# EAGLE board buffer_v2 (EAGLE 6.4)
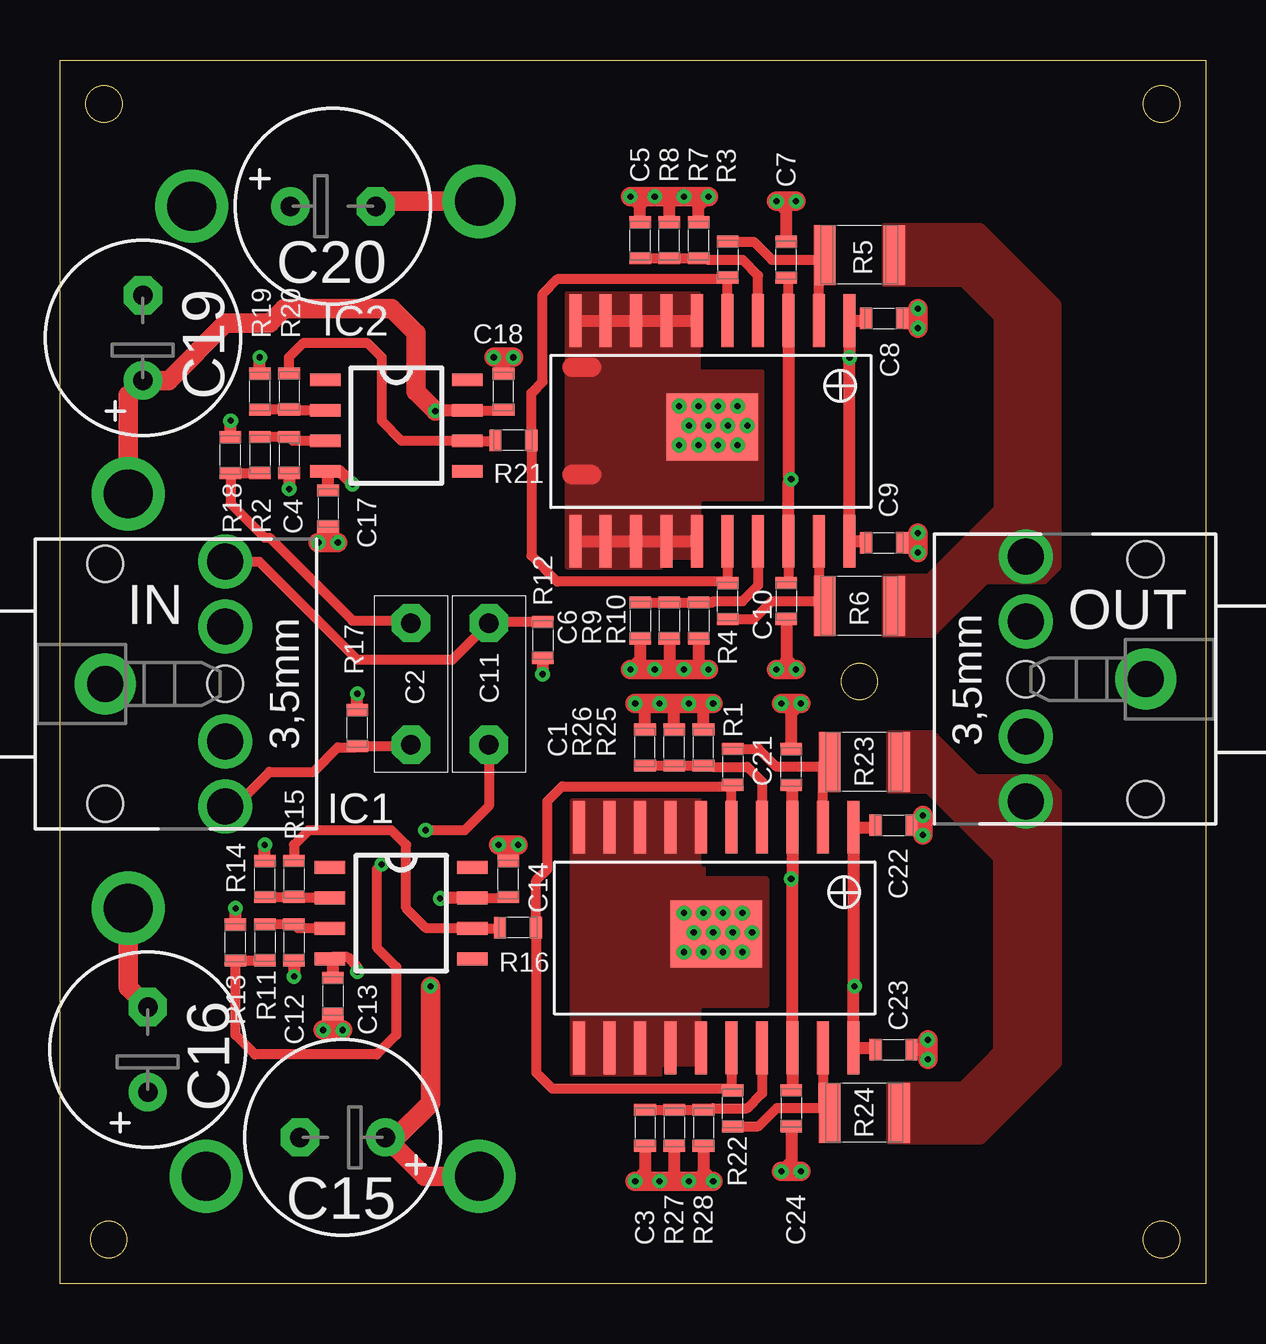
[diagram p0: board, top side]
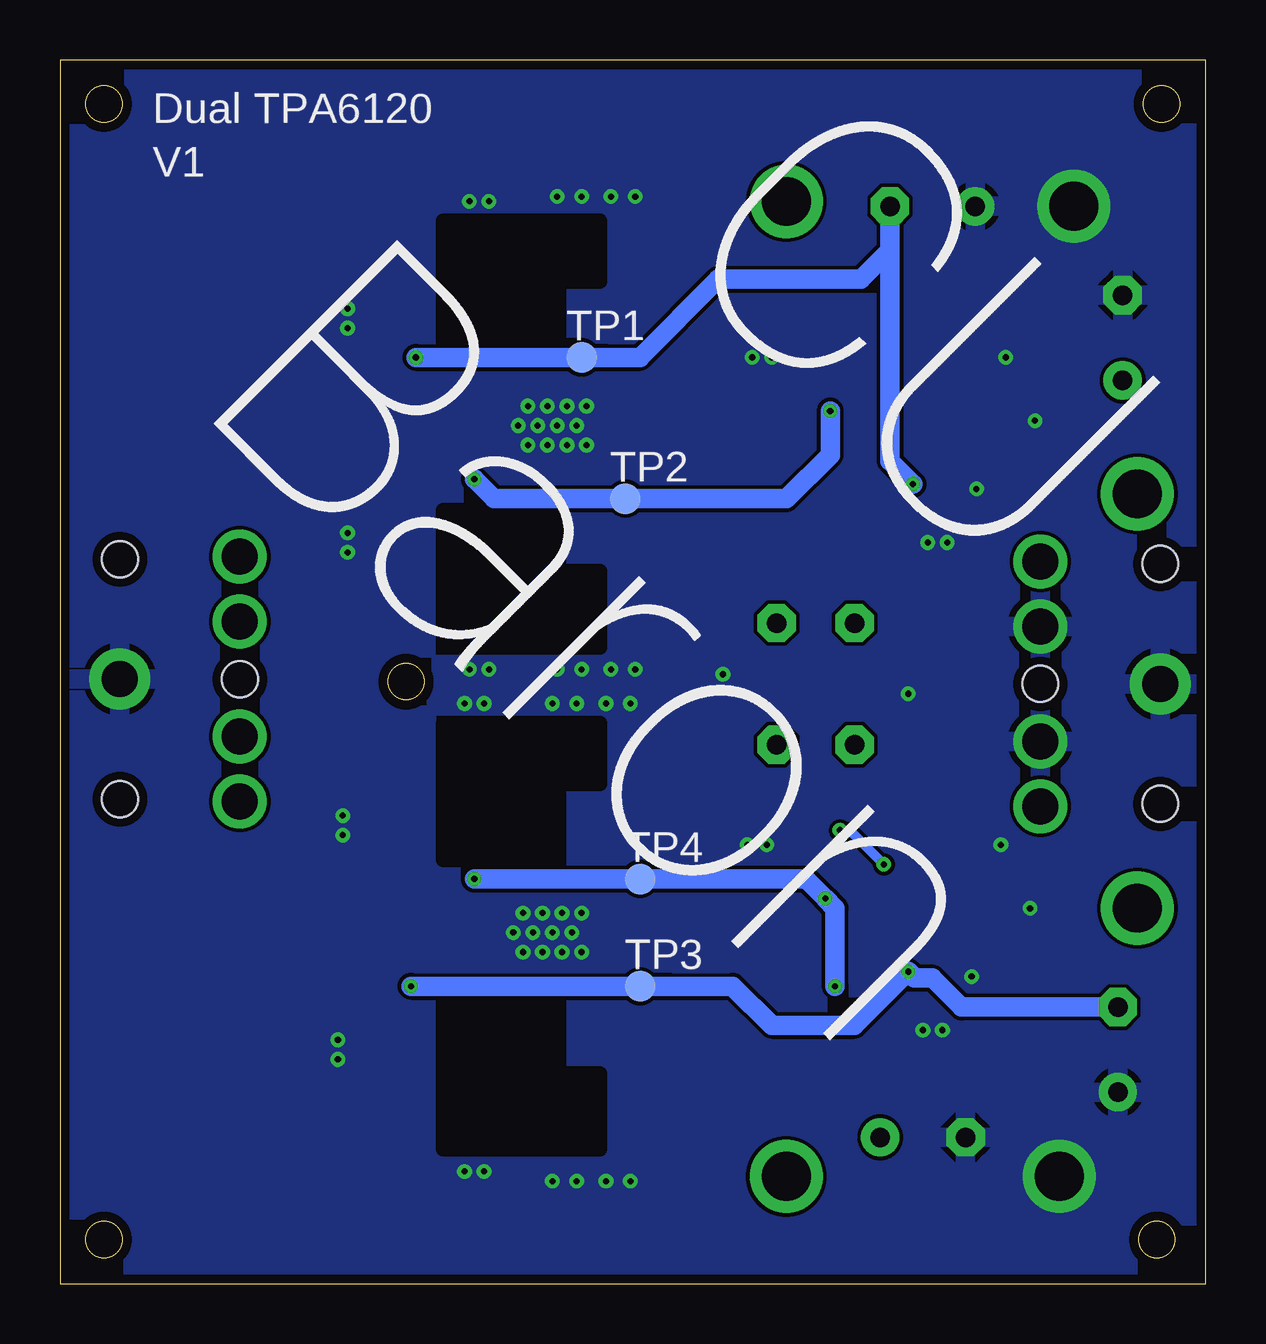
[diagram p1: board, bottom side, seen from below]

Size 47.75 x 51 mm. Coordinates in mm from the lower left corner, seen from the top.
Outline: 0,0 0,51 47.75,51 47.75,0 0,0
Outline: circle at 1.83,49.17 radius 0.76
Outline: circle at 45.92,49.17 radius 0.76
Outline: circle at 2.03,1.83 radius 0.76
Outline: circle at 45.92,1.83 radius 0.76
Outline: circle at 33.32,25.1 radius 0.76
Copper layers (1*16): Top 0.0356mm / dielectric 1.5011mm / Bottom 0.0356mm
Design rules "LaenPCBOrder": minimum track width 6mil, minimum drill 13mil, track to track 6mil, track to pad 6mil, pad to pad 6mil, via to via 6mil, smd to smd 6mil, copper to edge 15mil, drill to drill 6mil, minimum pad ring 7mil, minimum via ring 7mil, stop-mask expansion 3mil, vias tented up to drill 0mil, thermal gap 10mil
tRestrict: area 25.2,17.5 to 31.9,23.6; area 25.2,5.5 to 31.9,11.4; area 25.2,38.4 to 31.9,44.5; area 25.2,26.4 to 31.9,32.5
bRestrict: area 25.2,17.7 to 31.8,23.4; area 25.2,5.6 to 31.8,11.3; area 25.2,26.5 to 31.8,32.2; area 25.2,38.6 to 31.8,44.3

## Footprints (pad centres in the part's own frame; a part is rotated, then mirrored left to right if it is on the bottom)
0603L3 = smd 0.5 x 0.9: P$1 -0.75,0; P$2 0.75,0
R5B3 = drill 0.813 pad 1.6 octagon: 1 -2.54,0; 2 2.54,0
E3,5-8 = drill 0.813 pad 1.6: + -1.778,0 | drill 0.813 pad 1.6 octagon: - 1.778,0
8-LEAD-SOIC_N = smd 1.27 x 0.53: 1 -2.965,1.905; 2 -2.965,0.635; 3 -2.965,-0.635; 4 -2.965,-1.905; 5 2.965,-1.905; 6 2.965,-0.635; 7 2.965,0.635; 8 2.965,1.905
STX3100 = drill 1.5 pad 2.54: 1 2.7,-0.1 | drill 1.5: 2 7.7,5; 3 7.7,2.3; 4 7.7,-2.5; 5 7.7,-5.2 | hole 1.5: 2.7,4.9; 2.7,-5.1; 7.7,-0.1
1210L3 = smd 0.9 x 2.5: P$1 -1.45,0; P$2 1.45,0
TP13R = smd 1.3 x 1.3: TP 0,0
TPA6120_TPA6120 = smd 0.5 x 2.2: 1 0.25,1.095; 2 1.52,1.095; 3 2.79,1.095; 4 4.06,1.095; 5 5.33,1.095; 6 6.6,1.095; 7 7.87,1.095; 8 9.14,1.095; 9 10.41,1.095; 10 11.68,1.095; 11 11.68,10.295; 12 10.41,10.295; 13 9.14,10.295; 14 7.87,10.295; 15 6.6,10.295; 16 5.33,10.295; 17 4.06,10.295; 18 2.79,10.295; 19 1.52,10.295; 20 0.25,10.295 | smd 3.81 x 2.79: 21 5.965,5.54

## Placement (x,y rotation side)
C1  100nF/100V  [0603L3]  24.38,22.35 90 top
C2  100nF/50V  [R5B3]  14.63,24.99 90 top
C3  100nF/100V  [0603L3]  24.38,6.5 270 top
C4  100pF/100V  [0603L3]  9.55,34.54 270 top
C5  100nF/100V  [0603L3]  24.18,43.48 90 top
C6  100nF/100V  [0603L3]  24.18,27.64 270 top
C7  100nF/100V  [0603L3]  30.28,42.67 90 top
C8  100nF/100V  [0603L3]  34.34,40.23 0 top
C9  100nF/100V  [0603L3]  34.34,30.89 0 top
C10  100nF/100V  [0603L3]  30.28,28.45 270 top
C11  100nF/50V  [R5B3]  17.88,24.99 270 top
C12  100pF/100V  [0603L3]  9.75,14.22 270 top
C13  100nF/50V  [0603L3]  11.38,11.99 270 top
C14  100nF/50V  [0603L3]  18.69,16.87 90 top
C15  470uF  [E3,5-8]  11.79,6.1 180 top
C16  470uF  [E3,5-8]  3.66,9.75 90 top
C17  100nF/50V  [0603L3]  11.18,32.31 270 top
C18  100nF/50V  [0603L3]  18.49,37.19 90 top
C19  470uF  [E3,5-8]  3.45,39.42 90 top
C20  470uF  [E3,5-8]  11.38,44.91 0 top
C21  100nF/100V  [0603L3]  30.48,21.54 90 top
C22  100nF/100V  [0603L3]  34.75,19.1 0 top
C23  100nF/100V  [0603L3]  34.75,9.75 0 top
C24  100nF/100V  [0603L3]  30.48,7.32 270 top
IC1  AD8610ARZR-8  [8-LEAD-SOIC_N]  14.22,15.44 0 top
IC2  AD8610ARZR-8  [8-LEAD-SOIC_N]  14.02,35.76 0 top
IN  STEREOJACK  [STX3100]  -0.81,25.1 0 top
OUT  STEREOJACK  [STX3100]  47.96,25.1 180 top
R1  1k0  [0603L3]  28.04,21.54 270 top
R2  1k0  [0603L3]  8.33,34.54 270 top
R3  1k0  [0603L3]  27.84,42.67 270 top
R4  1k0  [0603L3]  27.84,28.45 90 top
R5  10  [1210L3]  33.32,42.88 180 top
R6  10  [1210L3]  33.32,28.24 180 top
R7  1k0  [0603L3]  26.62,43.48 90 top
R8  1k0  [0603L3]  25.4,43.48 90 top
R9  1k0  [0603L3]  25.4,27.64 270 top
R10  1k0  [0603L3]  26.62,27.64 270 top
R11  1k0  [0603L3]  8.53,14.22 270 top
R12  470k  [0603L3]  20.12,26.82 270 top
R13  470k  [0603L3]  7.32,14.22 90 top
R14  1k0  [0603L3]  8.53,16.87 90 top
R15  1k0  [0603L3]  9.75,16.87 270 top
R16  1k0  [0603L3]  19.1,14.83 180 top
R17  470k  [0603L3]  12.4,23.16 90 top
R18  470k  [0603L3]  7.11,34.54 90 top
R19  1k0  [0603L3]  8.33,37.19 90 top
R20  1k0  [0603L3]  9.55,37.19 270 top
R21  1k0  [0603L3]  18.9,35.15 180 top
R22  1k0  [0603L3]  28.04,7.32 90 top
R23  10  [1210L3]  33.53,21.74 180 top
R24  10  [1210L3]  33.53,7.11 180 top
R25  1k0  [0603L3]  26.82,22.35 90 top
R26  1k0  [0603L3]  25.6,22.35 90 top
R27  1k0  [0603L3]  25.6,6.5 270 top
R28  1k0  [0603L3]  26.82,6.5 270 top
TP1  PTR1TP13R  [TP13R]  26.01,38.61 0 bottom
TP2  PTR1TP13R  [TP13R]  24.18,32.72 0 bottom
TP3  PTR1TP13R  [TP13R]  23.57,12.4 0 bottom
TP4  PTR1TP13R  [TP13R]  23.57,16.87 0 bottom
U$1  TPA6120_TPA6120  [TPA6120_TPA6120]  33.16,41.24 180 top
U$2  TPA6120_TPA6120  [TPA6120_TPA6120]  33.32,20.12 180 top

## Library data of the parts
C1 C3-C10 C12-C14 C17 C18 C21-C24 R1-R28 = common
C2 C11 = Capacitor-Wima-MKS2-100v
C15 C16 C19 C20 = rcl
IC1 IC2 = ad8610arz
IN OUT = adafruit
TP1-TP4 = testpad
U$1 U$2 = amp

## Nets
+12V_L: C7.P$1 C10.P$1 C18.P$1 C19.+ IC2.7 TP2.TP U$1.3 U$1.18
+12V_R: C14.P$1 C15.+ C21.P$1 C24.P$1 IC1.7 TP4.TP U$2.3 U$2.18
-12V_L: C8.P$1 C9.P$1 C17.P$1 C20.- IC2.4 TP1.TP U$1.1 U$1.20
-12V_R: C13.P$1 C16.- C22.P$1 C23.P$1 IC1.4 TP3.TP U$2.1 U$2.20
BUFF_L_OUT: R3.P$2 R4.P$2 R21.P$1 U$1.5 U$1.16
BUFF_R_OUT: R1.P$2 R16.P$1 R22.P$2 U$2.5 U$2.16
BUFFER_L_OUT: IC2.6 R20.P$1 R21.P$2
BUFFER_R_OUT: IC1.6 R15.P$1 R16.P$2
GND: C1.P$2 C3.P$2 C4.P$2 C5.P$2 C6.P$2 C7.P$2 C8.P$2 C9.P$2 C10.P$2 C12.P$2 C13.P$2 C14.P$2 C15.- C16.+ C17.P$2 C18.P$2 C19.- C20.+ C21.P$2 C22.P$2 C23.P$2 C24.P$2 IN.1 IN.3 IN.4 OUT.1 R7.P$2 R8.P$2 R9.P$2 R10.P$2 R12.P$2 R13.P$2 R14.P$2 R17.P$2 R18.P$2 R19.P$2 R25.P$2 R26.P$2 R27.P$2 R28.P$2 U$1.6 U$1.7 U$1.8 U$1.9 U$1.10 U$1.11 U$1.12 U$1.13 U$1.14 U$1.15 U$1.21 U$2.6 U$2.7 U$2.8 U$2.9 U$2.10 U$2.11 U$2.12 U$2.13 U$2.14 U$2.15 U$2.21
HP_IN_L: C2.1 IN.5 R17.P$1
HP_IN_R: C11.1 IN.2 R12.P$1
HP_OUT_L: OUT.5 R5.P$1 R6.P$1
HP_OUT_R: OUT.2 R23.P$1 R24.P$1
N$1: C11.2 R11.P$2 R13.P$1
N$2: C12.P$1 IC1.3 R11.P$1
N$5: IC1.2 R14.P$1 R15.P$2
N$6: C2.2 R2.P$2 R18.P$1
N$7: C4.P$1 IC2.3 R2.P$1
N$12: IC2.2 R19.P$1 R20.P$2
N$13: C1.P$1 R25.P$1 R26.P$1 U$2.4
N$14: C3.P$1 R27.P$1 R28.P$1 U$2.17
N$19: C5.P$1 R7.P$1 R8.P$1 U$1.4
N$20: C6.P$1 R9.P$1 R10.P$1 U$1.17
OUT_L: R3.P$1 R5.P$2 U$1.2
OUT_L1: R1.P$1 R23.P$2 U$2.2
OUT_R: R4.P$1 R6.P$2 U$1.19
OUT_R1: R22.P$1 R24.P$2 U$2.19

## Tracks (layer width: path | path; a pad name or v marks a point on that pad's centre or on a via)
+12V_L  (via drill 0.25, 2.03)
  Top 0.406: IC2.7 18.45,36.4 C18.P$1 | U$1.3 30.37,41.83 C7.P$1 | U$1.18 30.37,29.29 C10.P$1
  Top 0.508: IC2.7 15.67,36.4 v15.65,36.37 | U$1.3 30.37,33.64 v30.48,33.53 30.37,33.42 U$1.18
  Top 0.813: v2.84,32.92 2.84,37.03 C19.+ 4.52,37.64 6.91,40.03 8.74,40.03 9.35,40.64 13.82,40.64 14.83,39.62 14.83,37.19 v15.65,36.37
  Bottom 0.813: v30.48,33.53 29.67,32.72 TP2.TP 23.37,32.72 17.48,32.72 15.65,34.54 v15.65,36.37
+12V_R  (via drill 0.25, 2.03)
  Top 0.406: IC1.7 18.66,16.08 C14.P$1
  Top 0.508: C24.P$1 30.53,8.12 U$2.18 30.53,16.81 v30.48,16.87 30.53,16.92 U$2.3 30.53,20.73 C21.P$1 | IC1.7 15.87,16.08 v15.85,16.05
  Top 0.813: v17.48,4.47 15.19,4.47 C15.+ 14.02,6.1 15.44,7.52 v15.44,12.4
  Bottom 0.813: v15.44,12.4 15.44,15.65 v15.85,16.05 16.66,16.87 22.76,16.87 TP4.TP v30.48,16.87
-12V_L  (via drill 0.25, 2.03)
  Top 0.508: C9.P$1 33.53,30.94 U$1.20 v32.91,38.6 v32.92,38.61 v32.91,38.62 U$1.1 33.5,40.14 C8.P$1 | C17.P$1 11.18,33.74 IC2.4 11.66,33.86 v12.19,33.32
  Top 0.813: v17.48,45.11 13.36,45.11 C20.-
  Bottom 0.508: TP1.TP 25,38.61 24.99,38.6
  Bottom 0.813: C20.- 13.16,43.08 | 13.16,43.08 13.16,34.29 v12.19,33.32 | v32.91,38.6 24.99,38.6 23.58,38.6 20.32,41.86 14.38,41.86 13.16,43.08
-12V_R  (via drill 0.25, 2.03)
  Top 0.406: v12.4,13 12.4,13.21 11.99,13.61 11.34,13.61 IC1.4
  Top 0.508: C22.P$1 33.92,19.02 U$2.1 33.07,12.44 v33.12,12.4 33.07,12.35 U$2.20 33.93,9.82 C23.P$1 | C13.P$1 11.38,13.42 IC1.4
  Top 0.813: v2.84,15.65 2.84,12.34 C16.-
  Bottom 0.813: C16.- 10.17,11.53 C13.P$1 12.13,12.74 v12.4,13 14.63,10.77 18.08,10.77 19.71,12.4 22.35,12.4 TP3.TP v33.12,12.4
BUFF_L_OUT
  Top 0.406: R4.P$2 U$1.16 27.83,29.27 27.84,29.26 20.73,29.26 19.65,30.34 R21.P$1 19.65,37.12 20.12,37.59 20.12,41.25 20.73,41.86 27.84,41.86 27.83,41.85 U$1.5 R3.P$2 27.78,41.86
BUFF_R_OUT
  Top 0.406: U$2.5 27.99,20.74 R1.P$2 27.98,20.73 20.93,20.73 20.32,20.12 20.32,17.27 19.85,16.8 R16.P$1 19.85,8.8 20.52,8.13 28.04,8.13 27.99,8.18 U$2.16 27.99,8.11 R22.P$2
BUFFER_L_OUT
  Top 0.406: R20.P$1 9.55,38.61 10.16,39.22 12.8,39.22 13.41,38.61 13.41,35.97 14.25,35.13 IC2.6 18.12,35.13 R21.P$2
BUFFER_R_OUT
  Top 0.406: R16.P$2 18.33,14.81 IC1.6 15.27,14.81 14.43,15.65 14.43,18.29 13.82,18.9 10.36,18.9 9.75,18.29 R15.P$1
GND  (via drill 0.25, 2.03)
  Top 0.508: C22.P$2 35.97,19.1 | C23.P$2 36.17,9.75 | C1.P$2 24.38,24.18 | R26.P$2 25.6,24.18 | R25.P$2 26.82,24.18 | R10.P$2 26.62,25.6 | R9.P$2 25.4,25.6 | C6.P$2 24.18,26.01 v23.77,25.6 | C10.P$2 30.28,26.01 v30.68,25.6 | C21.P$2 30.48,23.77 v30.89,24.18 | C8.P$2 35.36,40.23 v35.76,40.64 | C9.P$2 35.36,30.89 v35.76,30.48 | C7.P$2 30.28,44.7 v29.87,45.11 | C3.P$2 24.38,4.67 v23.98,4.27 | R27.P$2 25.6,4.27 | R28.P$2 26.82,4.67 v27.23,4.27 | C24.P$2 30.48,5.08 v30.07,4.67 | C13.P$2 11.38,10.97 v10.97,10.57 | C14.P$2 18.69,17.88 v19.1,18.29 | C18.P$2 18.49,38.2 v18.08,38.61 | C17.P$2 11.18,31.29 v10.77,30.89 | R19.P$2 v8.33,38.61 | C4.P$2 v9.55,33.12 | R18.P$2 v7.11,35.97 | R17.P$2 v12.4,24.59 | R12.P$2 v20.12,25.4 | R13.P$2 v7.32,15.65 | R14.P$2 v8.53,18.29 | C12.P$2 v9.75,12.8 | U$1.10 U$1.9 U$1.8 U$1.7 U$1.6 | U$1.11 U$1.12 U$1.13 U$1.14 U$1.15 | C5.P$2 24.18,44.91 v23.77,45.31 | R8.P$2 25.4,45.31 | R7.P$2 26.62,44.91 v27.03,45.31
  Top 0.813: v35.97,19.51 35.97,19.1 v35.97,18.69 | v36.17,9.35 36.17,9.75 v36.17,10.16 | v23.77,25.6 v24.79,25.6 25.4,25.6 v26.01,25.6 26.62,25.6 v27.03,25.6 | v23.98,24.18 24.38,24.18 v24.99,24.18 25.6,24.18 v26.21,24.18 26.82,24.18 v27.23,24.18 | v29.87,25.6 v30.68,25.6 | v30.07,24.18 v30.89,24.18 | v35.76,40.64 v35.76,39.83 | v35.76,31.29 v35.76,30.48 | v23.77,45.31 v24.79,45.31 25.4,45.31 v26.01,45.31 v27.03,45.31 | v29.87,45.11 v30.68,45.11 | v23.98,4.27 v24.99,4.27 25.6,4.27 v26.21,4.27 v27.23,4.27 | v30.07,4.67 v30.89,4.67 | v10.97,10.57 v11.79,10.57 | v18.29,18.29 v19.1,18.29 | v18.08,38.61 v18.9,38.61 | v10.77,30.89 v11.58,30.89 | 21.34,38.2 22.15,38.2 | 21.34,33.73 22.15,33.73
  other vias: 6.1,4.47 5.49,44.91 26.01,15.44 26.82,15.44 27.64,15.44 28.45,15.44 28.85,14.63 28.04,14.63 27.23,14.63 26.42,14.63 26.01,13.82 26.82,13.82 27.64,13.82 28.45,13.82 25.81,36.58 26.62,36.58 27.43,36.58 28.24,36.58 28.65,35.76 27.84,35.76 27.03,35.76 26.21,35.76 25.81,34.95 26.62,34.95 27.43,34.95 28.24,34.95
  pour Bottom: 0.41,50.6 47.35,50.6 47.35,0.41 0.41,0.41
  pour Top (no thermals): 29.26,38 26.62,38 26.62,41.25 21.13,41.25 21.13,29.87 26.82,29.87 26.82,32.72 29.26,32.72
  pour Top (no thermals): 29.46,16.87 26.82,16.87 26.82,20.12 21.34,20.12 21.34,8.74 27.03,8.74 27.03,11.58 29.46,11.58
HP_IN_L
  Top 0.406: C2.1 14.59,22.41 R17.P$1 12.33,22.35 11.58,22.35 10.57,21.34 8.74,21.34 7.3,19.9 IN.5
HP_IN_R
  Top 0.406: R12.P$1 17.92,27.57 C11.1 16.36,26.01 12.4,26.01 8.31,30.1 IN.2
HP_OUT_L
  pour Top (no thermals): 34.34,27.03 36.37,27.03 38.61,29.26 41.05,29.26 41.66,29.87 41.66,40.84 38.4,44.09 34.34,44.09 34.34,41.66 37.59,41.66 39.01,40.23 39.01,32.31 36.17,29.46 34.34,29.46
HP_OUT_R
  pour Top (no thermals): 34.54,22.96 36.37,22.96 38.2,21.13 41.05,21.13 41.66,20.52 41.66,9.14 38.4,5.89 34.75,5.89 34.54,5.89 34.54,8.33 37.59,8.33 38.61,9.35 39.01,9.75 39.01,17.68 36.17,20.52 34.54,20.52
N$1  (via drill 0.25)
  Top 0.406: R11.P$2 R13.P$1 7.32,10.36 8.13,9.55 13.21,9.55 14.02,10.36 14.02,13.21 13.21,14.02 13.21,17.27 v13.41,17.48 | C11.2 17.88,19.91 16.87,18.9 v15.24,18.9
  Bottom 0.406: v15.24,18.9 14.83,18.9 v13.41,17.48
N$2
  Top 0.406: IC1.3 9.92,14.81 C12.P$1 R11.P$1
N$5
  Top 0.406: R14.P$1 R15.P$2 9.79,16.08 IC1.2
N$6
  Top 0.406: R2.P$2 R18.P$1 7.11,32.51 8.53,31.09 8.74,31.09 12.19,27.64 14.53,27.64 C2.2
N$7
  Top 0.406: IC2.3 9.72,35.13 C4.P$1 R2.P$1
N$12
  Top 0.406: IC2.2 9.59,36.4 R20.P$2 R19.P$1
N$13
  Top 0.178: 26.98,21.65 R25.P$1
  Top 0.406: C1.P$1 R26.P$1 R25.P$1 27.17,21.6 27.23,21.54 28.65,21.54 29.26,20.93 U$2.4
N$14
  Top 0.406: U$2.17 29.26,7.93 28.65,7.32 27.23,7.32 27.17,7.25 R28.P$1 R27.P$1 C3.P$1
N$19
  Top 0.406: U$1.4 29.1,42.02 28.45,42.67 27.03,42.67 26.96,42.73 R7.P$1 R8.P$1 C5.P$1
N$20
  Top 0.406: U$1.17 29.1,29.1 28.45,28.45 27.23,28.45 27.17,28.39 R10.P$1 R9.P$1 C6.P$1
OUT_L
  Top 0.406: U$1.2 31.64,42.64 R5.P$2 31.67,42.67 29.67,42.67 28.92,43.42 R3.P$1
OUT_L1
  Top 0.406: U$2.2 31.8,21.67 R23.P$2 31.87,21.71 31.7,21.54 29.87,21.54 29.12,22.29 R1.P$1
OUT_R
  Top 0.406: U$1.19 31.64,28.48 R6.P$2 31.67,28.45 29.67,28.45 28.92,27.7 R4.P$1
OUT_R1
  Top 0.406: U$2.19 31.8,7.18 R24.P$2 31.87,7.14 31.7,7.32 29.87,7.32 29.12,6.57 R22.P$1

## Text on the board
bPlace: Dual TPA6120 | V1